# Altium PCB USB-I2C.PcbDoc
Units mm, origin at the board's own origin, x right, y up, seen from the top; angles counter-clockwise.
Board outline 60 x 42.5 mm, 2 copper layers (Top Layer, Bottom Layer); 41 components, 25 nets, 147 pads, 24 vias.
Unrouted connection lines stored in the file: 1.
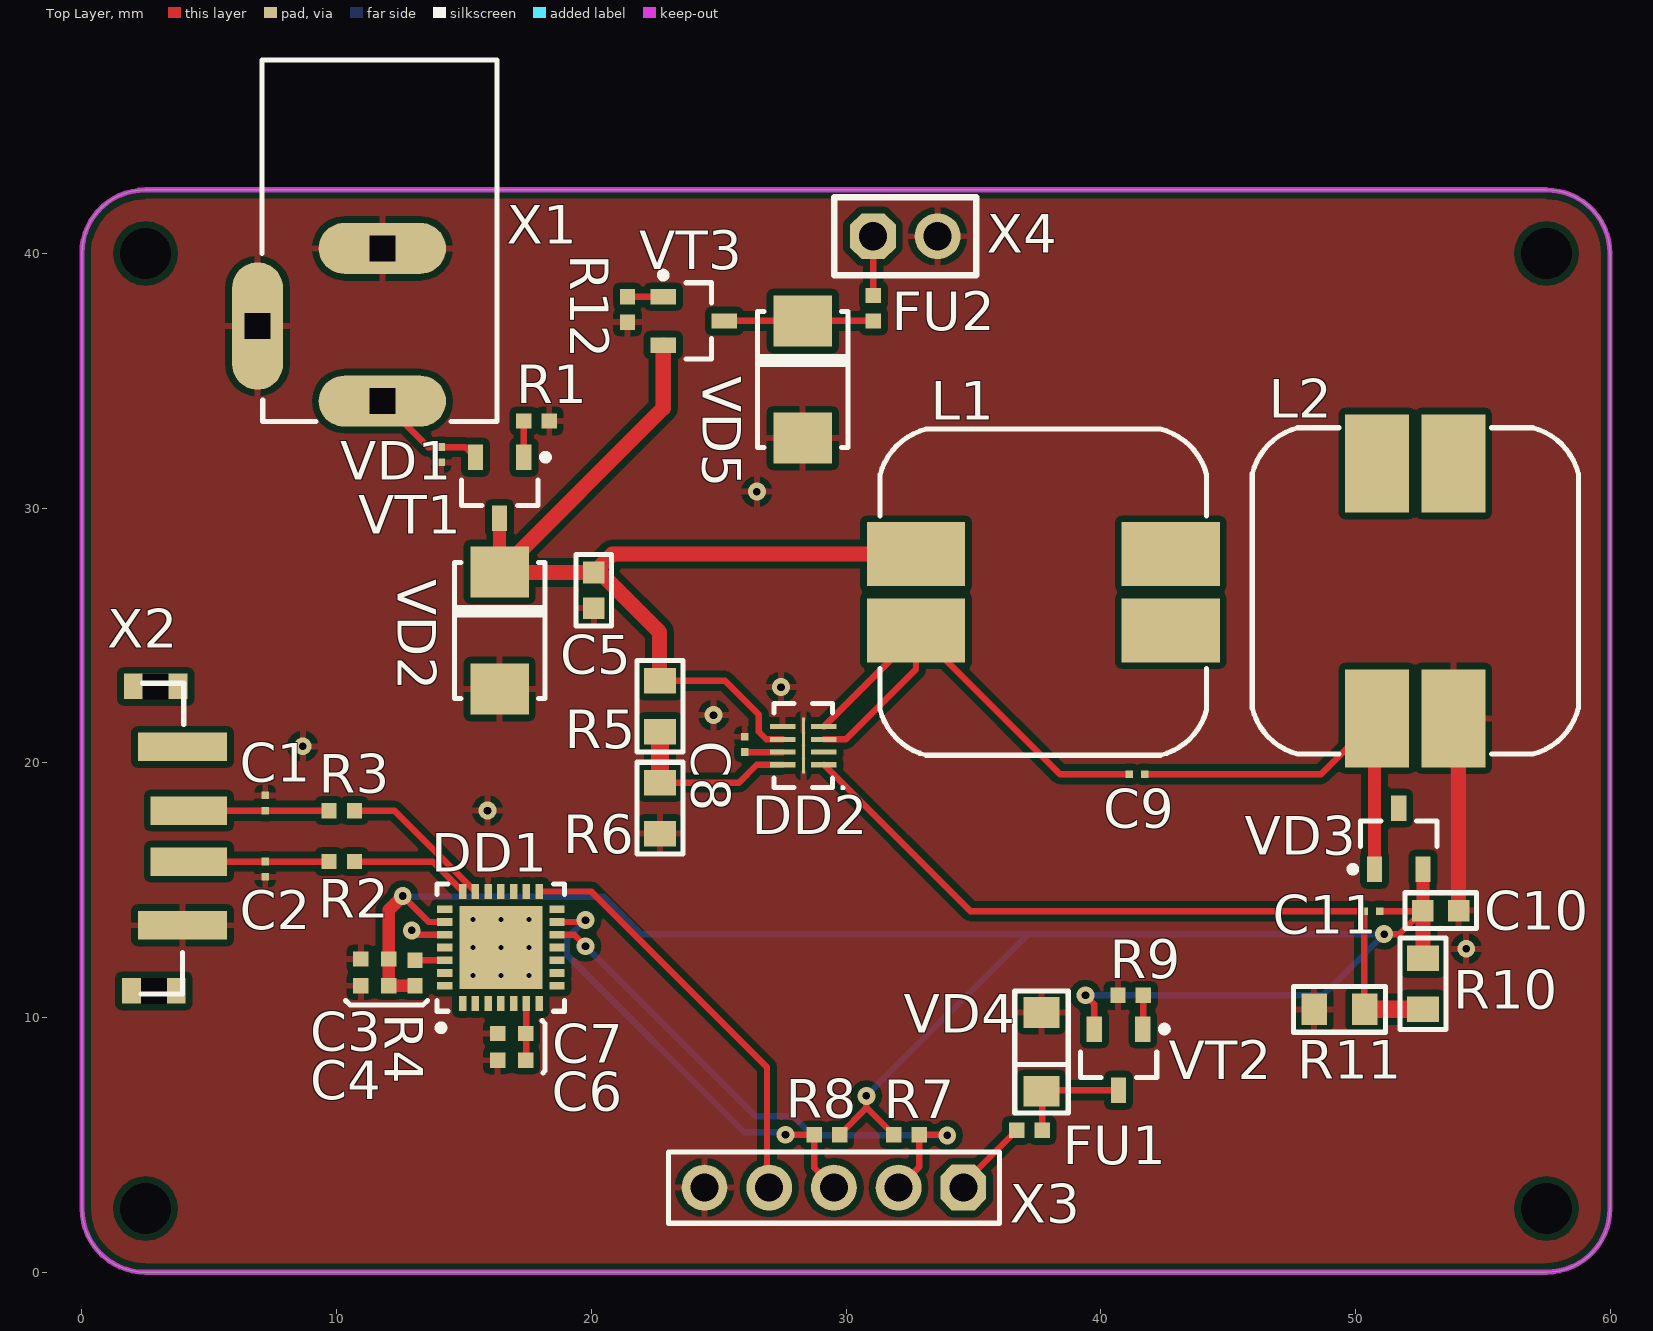
[diagram p0: Top Layer view]
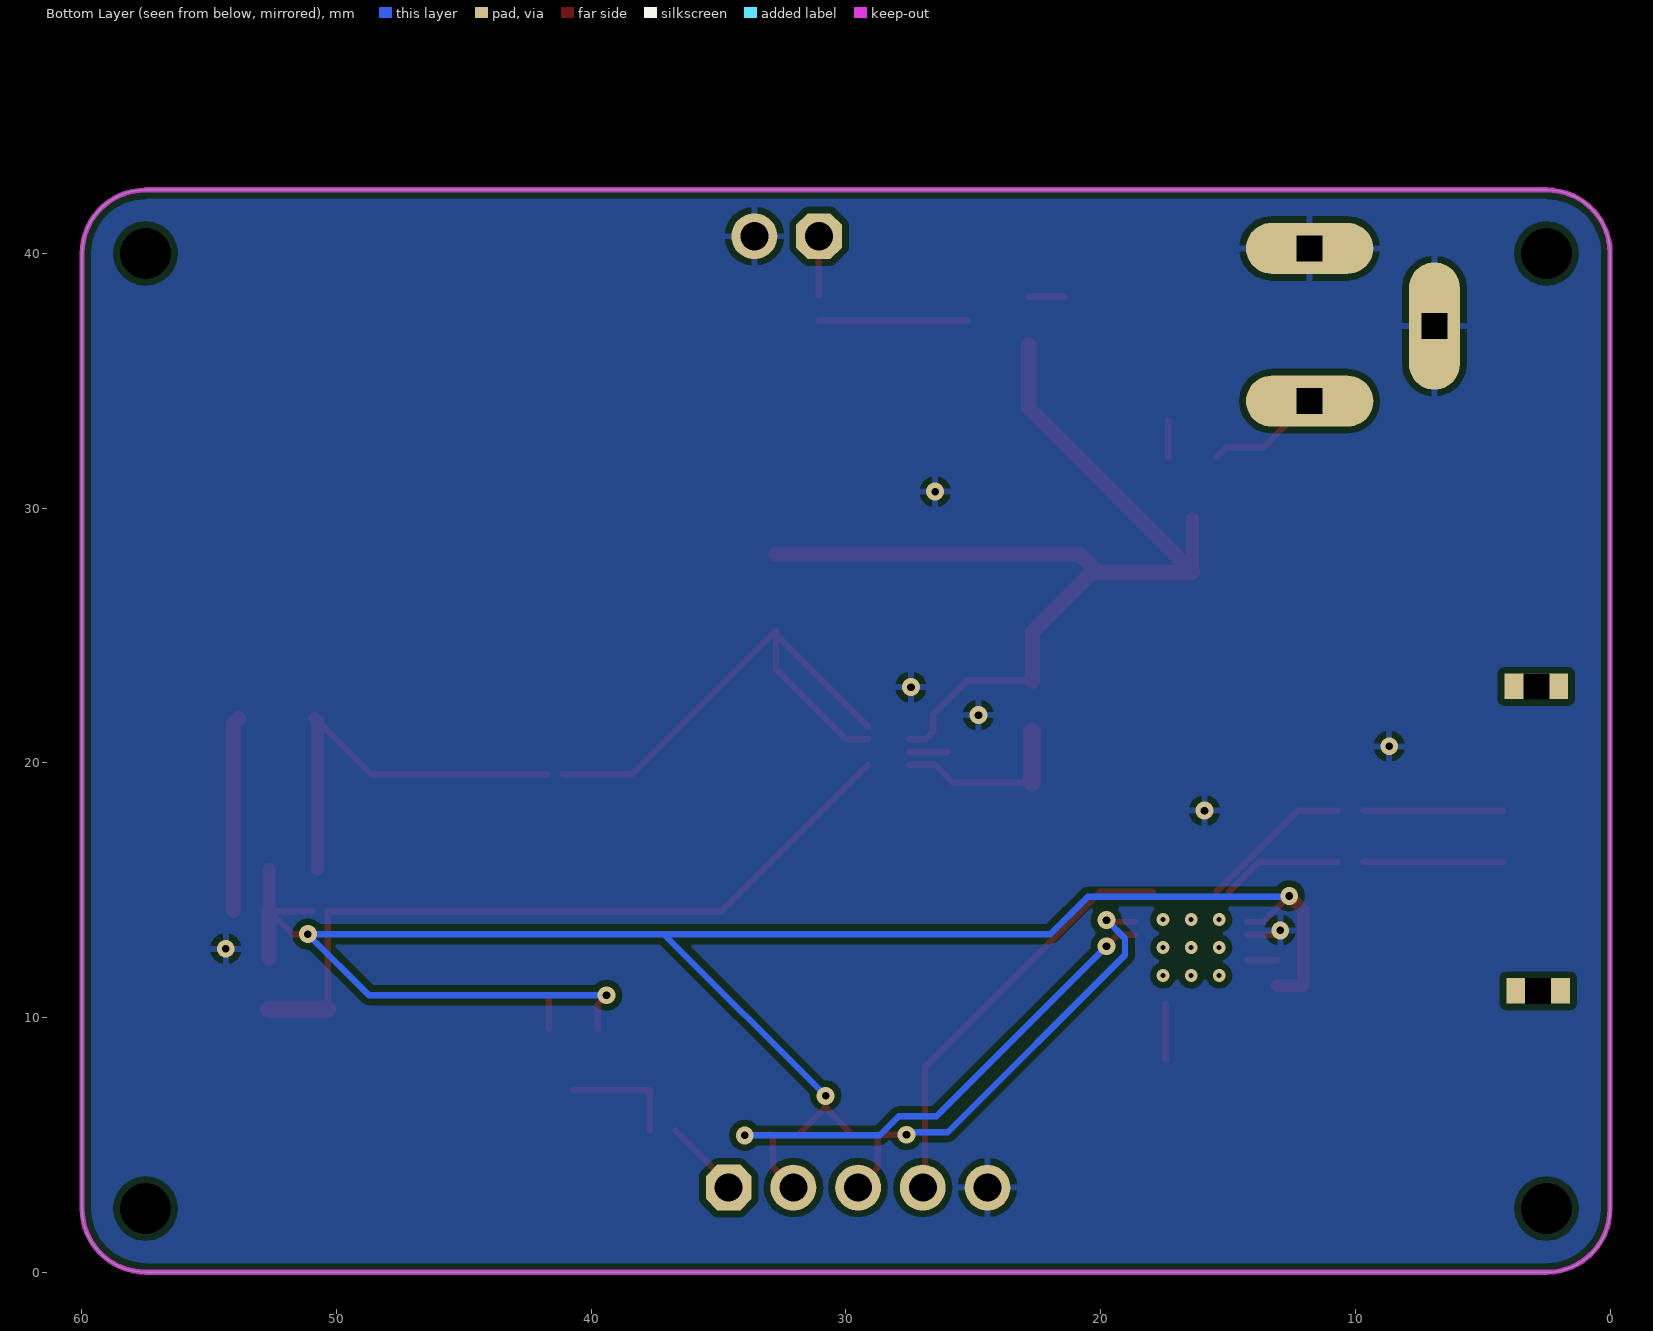
[diagram p1: Bottom Layer view, seen from below]
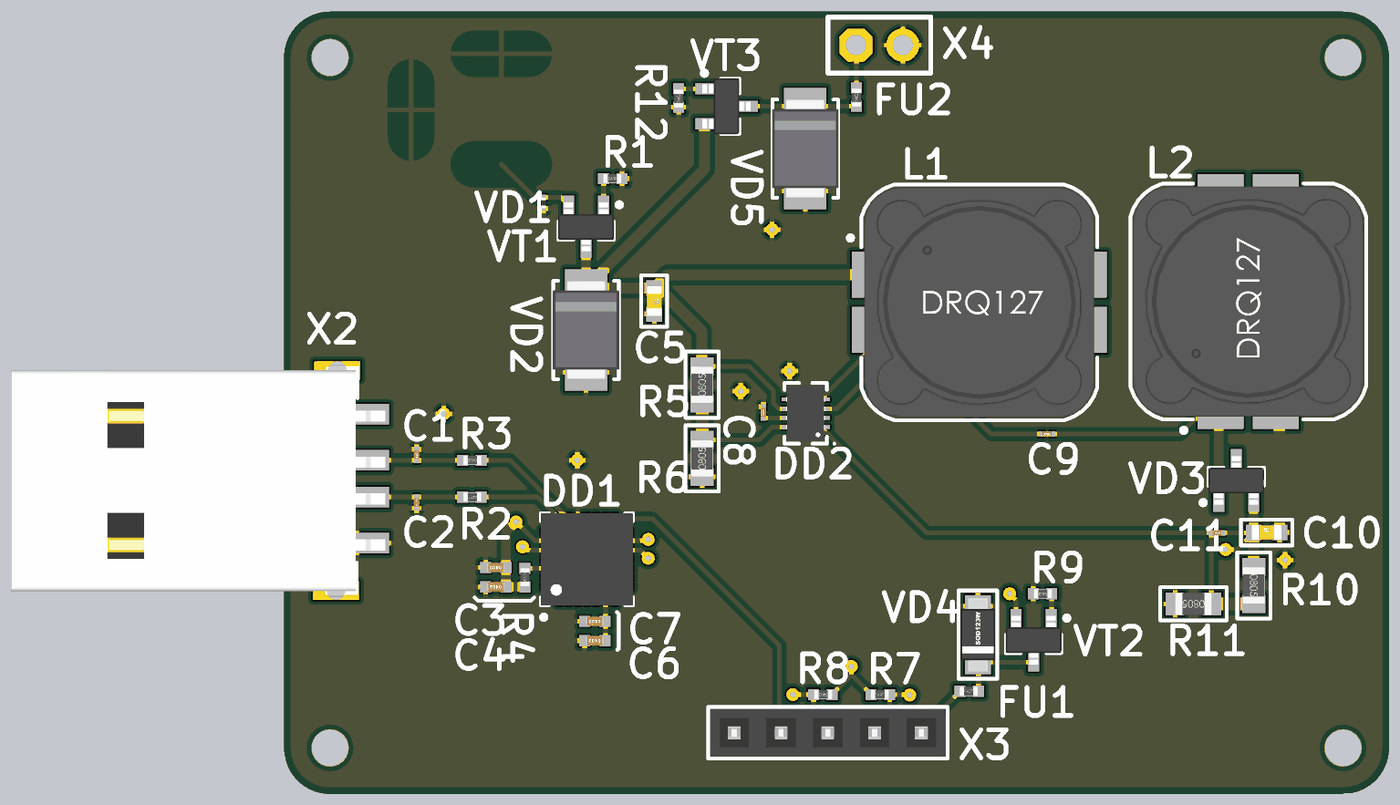
[diagram p2: 3D render of the assembled board from above, using the file's embedded part models]

## Layer stack, top to bottom
Top Solder: solder mask 0.0102, Solder Resist, Dk 3.5
Top Layer: signal copper 0.0356
Dielectric 1: dielectric 0.32, FR-4, Dk 4.8
Bottom Layer: signal copper 0.0356
Bottom Solder: solder mask 0.0102, Solder Resist, Dk 3.5

## Board outline
0,2.5 0,40 0,40.001 cw(c2.492,40.001) 2.492,42.493 2.5,42.5 57.5,42.5 57.5,42.492 cw(c57.5,40) 59.992,40 60,40 60,2.5 59.992,2.5 cw(c57.5,2.5) 57.5,0.008 57.5,0 2.5,0 cw(c2.5,2.492)

## Design rules (kind name [scope] priority, off if disabled: settings)
Clearance [All] p1: gap=0.254 ignorepadtopadclearanceinfootprint=FALSE except(0: Arc-Hole Track-Hole SMDPad-Hole THPad-Hole Via-Hole Fill-Hole Poly-Hole Region-Hole Text-Hole)
PolygonConnect [All] p1: connectstyle=Relief reliefconductorwidth=0.254 reliefentries=4 polygonreliefangle="90 Angle" airgapwidth=0.254
RoutingVias [All] p1: holewidth=0.711 width=1.27 viastyle="Through Hole" minholewidth=0.711 minwidth=1.27 maxholewidth=0.711 maxwidth=1.27
SolderMaskExpansion [All] p1: expansion=0.102
Width [All] p1: maxlimit=0.7 minlimit=0.25 preferedwidth=0.4
30 further rules are at their usual default settings.

## Components (designator, comment, footprint, x,y, rotation, side; value= is the part's Value field where it differs from the comment)
C1 "Capacitor" CH0201C 7.2,18.425 r90 top
C2 "Capacitor" CH0201C 7.2,15.825 r270 top
C3 "Capacitor" CH0402C 11.5,12.3 r180 top
C4 "Capacitor" CH0402C 11.5,11.25 r180 top
C5 "Capacitor" CH0603C 20.1,26.775 r270 top
C6 "Capacitor" CH0402C 16.875,8.325 r180 top
C7 "Capacitor" CH0402C 16.875,9.375 r180 top
C8 "Capacitor" CH0201C 26.025,20.725 r90 top
C9 "Capacitor" CH0201C 41.425,19.55 r0 top
C10 "Capacitor" CH0603C 53.35,14.2 r0 top
C11 "Capacitor" CH0201C 50.65,14.175 r180 top
DD1 "FT260Q-R" FT260-Q 16.45,12.75 r90 top
DD2 "LT8335" LT8335 28.325,20.675 r180 top
FU1 "Fuse" CH0402R 37.2,5.575 r0 top value=200мА
FU2 "Fuse" CH0402R 31.075,37.85 r90 top value=200мА
L1 "Ferrite bead" "IND: DRQ127" 37.75,26.7 r0 top
L2 "Ferrite bead" "IND: DRQ127" 52.35,26.75 r90 top
R1 "Res_0.125" CH0402R 17.85,33.425 r0 top
R2 "Res_0.125" CH0402R 10.2,16.125 r180 top
R3 "Res_0.125" CH0402R 10.2,18.125 r180 top
R4 "Res_0.125" CH0402R 13.075,11.75 r270 top
R5 "Res_0.5" CH0805R 22.7,22.225 r90 top
R6 "Res_0.5" CH0805R 22.7,18.225 r90 top
R7 "Res_0.125" CH0402R 32.375,5.4 r0 top
R8 "Res_0.125" CH0402R 29.25,5.4 r180 top
R9 "Res_0.125" CH0402R 41.175,10.875 r180 top
R10 "Res_0.125" CH0805R 52.65,11.325 r270 top
R11 "Res_0.125" CH0805R 49.375,10.325 r180 top
R12 "Res_0.125" CH0402R 21.425,37.8 r90 top
VD1 "TVS-diod_simmetrical" CH0201L 14.1,32.1 r90 top
VD2 "TVS-diod_directed" DO214AA 16.4,25.2 r90 top
VD3 "Diod Schottky" SOT23_132 51.7,17.025 r90 top
VD4 "TVS-diod_directed" SOD123W 37.675,8.65 r270 top
VD5 "TVS-diod_directed" DO214AA 28.3,35.05 r90 top
VT1 "*" SOT23_132 16.4,30.8 r270 top
VT2 "*" SOT23_132 40.7,8.35 r270 top
VT3 "*" SOT23_132 24.025,37.35 r0 top
X1 "2_pins" "CON: 163-179PH-EX" 11.8,47.9 r270 top
X2 "USB 2.0" USB 4.2,17.125 r0 top
X3 "Header_5_plg" "CON: PBS-5" 29.525,3.325 r180 top
X4 "2_pins" "CON: PBS-2" 32.325,40.675 r0 top

## Footprints (in the part's own frame and the unit in brackets; to place one, negate y for a bottom-side part, rotate by r counter-clockwise, add the part's x,y. Pads: shape width x height; smd on the part's side, far side on the other; paste and mask are expansions set on the pad)
CH0201C [mm]
  rect 0.3x0.3 smd: 1(-0.3,0) 2(0.3,0)
  body extent -0.3,-0.15 0.3,0.15, height 0.31
CH0201L [mm]
  rect 0.3x0.3 smd: 1(-0.3,0) 2(0.3,0)
  body extent -0.3,-0.15 0.3,0.15, height 0.3
CH0402C [mm]
  rect 0.6x0.6 smd: 1(-0.55,0) 2(0.55,0)
  body extent -0.51,-0.25 0.51,0.25, height 0.51
CH0402R [mm]
  rect 0.6x0.6 smd: 1(-0.5,0) 2(0.5,0)
  body extent -0.52,-0.25 0.47,0.25, height 0.34
CH0603C [mm] "Chip Capacitor, 2-Leads, Body 1,53x0,85mm, IPC Medium Density"
  rect 0.85x0.85 smd: 1(-0.7,0) 2(0.7,0)
  silkscreen extent -1.4,-0.7 1.4,0.7, body extent -0.8,-0.4 0.8,0.4, height 0.3
CH0805R [mm]
  rect 1x1.25 smd: 1(-1,0) 2(1,0)
  silkscreen extent -1.8,-0.9 1.8,0.9, body extent -1,-0.6 1,0.6, height 0.44
"CON: 163-179PH-EX" [mm]
  oval 2x5 hole 1 square: 1(13.7,0) 2(7.7,0)
  oval 5x2 hole 1 square: 2(10.75,-4.9)
  round 0.5 on Mech1: ""(14,-3)
  silkscreen extent 0.3,-4.72 14.5,4.5, body extent 0,-5 14.4,4.4, height 11.05
"CON: PBS-2" [mm] "PBS-2"
  oct 1.8x1.8 hole 1.1: 1(-1.27,0)
  round 1.8 hole 1.1: 2(1.27,0)
  silkscreen extent -2.79,-1.52 2.79,1.52
"CON: PBS-5" [mm] "PBS-5"
  oct 1.8x1.8 hole 1.1: 1(-5.08,0)
  round 1.8 hole 1.1: 2(-2.54,0) 3(0,0) 4(2.54,0) 5(5.08,0)
  silkscreen extent -6.5,-1.4 6.5,1.4, body extent -6.35,-1.27 6.35,1.27, height 8.43
DO214AA [mm] "SMB"
  rect 2x2.3 smd: 1(-2.3,0) 2(2.3,0)
  round 0.5 on Mech1: ""(2.1,1.3)
  silkscreen extent -2.67,-1.78 2.67,1.78, body extent -2.7,-1.8 2.7,1.8, height 2.3
FT260-Q [mm] "PQFN, 28-Leads, Body 5,00x5,00mm, Pitch 0,50mm, Thermal Pad 3,25x3,25mm, IPC Medium Density"
  rect 0.6x0.3 smd: 1(-2.2,1.5) 2(-2.2,1) 3(-2.2,0.5) 4(-2.2,0) 5(-2.2,-0.5) 6(-2.2,-1) 7(-2.2,-1.5) 15(2.2,-1.5) 16(2.2,-1) 17(2.2,-0.5) 18(2.2,0) 19(2.2,0.5) 20(2.2,1) 21(2.2,1.5)
  rect 0.3x0.6 smd: 8(-1.5,-2.2) 9(-1,-2.2) 10(-0.5,-2.2) 11(0,-2.2) 12(0.5,-2.2) 13(1,-2.2) 14(1.5,-2.2) 22(1.5,2.2) 23(1,2.2) 24(0.5,2.2) 25(0,2.2) 26(-0.5,2.2) 27(-1,2.2) 28(-1.5,2.2)
  rect 3.25x3.25 smd: 29(0,0)
  silkscreen extent -3.27,-2.5 2.5,2.5, body extent -2.5,-2.5 2.5,2.5, height 0.8
"IND: DRQ127" [mm] "Inductor"
  rect 3.85x2.5 smd: 1(-5,1.5) 2(-5,-1.5) 3(5,-1.5) 4(5,1.5)
  round 0.5 on Top Overlay: ""(-7,3.5)
  round 0.5 on Mech1: ""(-5.7,3.5)
  silkscreen extent -6.41,-6.4 6.41,6.4, body extent -6.25,-6.25 6.25,6.25, height 8
LT8335 [mm] "SON, 8-Leads, Body 3,00x2,00mm, Pitch 0,50mm, Thermal Pad 2,20x0,12mm, IPC Medium Density"
  rect 1x0.2 smd: 1(-0.81,0.75) 2(-0.81,0.25) 3(-0.81,-0.25) 4(-0.81,-0.75) 5(0.81,-0.75) 6(0.81,-0.25) 7(0.81,0.25) 8(0.81,0.75)
  rect 0.12x2.2 smd: 9(0,0)
  silkscreen extent -1.6,-1.65 1.15,1.7, body extent -1.05,-1.5 1.05,1.5, height 0.75
SOD123W [mm]
  rect 1.2x1.4 smd: 1(-1.55,0) 2(1.55,0)
  silkscreen extent -2.4,-1.05 2.4,1.05, body extent -2,-0.95 2,0.95, height 1.1
SOT23_132 [mm] "SOT23, 3-Leads, Body 3,0x2,6mm (max), Pitch 0,95mm, IPC Medium Density"
  rect 1x0.6 smd: 1(-1.2,0.95) 2(-1.2,-0.95) 3(1.2,0)
  round 0.5 on Mech1: ""(-0.9,1.1)
  silkscreen extent -1.32,-1.5 0.7,1.92, body extent -1.32,-1.52 1.32,1.52, height 1.12
USB [mm]
  rect 3.5x1.12 smd: 1(-0.25,3.5) 4(-0.25,-3.5)
  rect 3x1.12 smd: 2(0,1) 3(0,-1)
  rect 2.5x1 hole 1 square: 10(-1.375,-6.075) 10(-1.3,5.875)
  silkscreen extent -1.88,-6.2 -0.2,6, body extent -19,-6.4 1.3,6.2, height 3.2

## Part data
C1 C2: Capacitance=47, Case=0201, Manufacture=TDK, Voltage=25В, HelpURL=https://ru.mouser.com/ProductDetail/TDK/CGA1A2C0G1E470J030BA?qs=LcTL%2f5vFEzGP84WOj%2f5Msw==&utm_source=netcomponents&utm_medium=aggregator&utm_campaign=CGA1A2C0G1E470J030BA&utm_term=CGA1A2C0G1E470J030BA&utm_content=TDK, Model=CGA1A2C0G1E470J030BA
C3 C6: Capacitance=4,7мк, Case=0402, Manufacture="Murata Electronics", Voltage=10В, HelpURL=https://ru.mouser.com/ProductDetail/Murata-Electronics/ZRB15XR61A475KE01D?qs=sGAEpiMZZMs0AnBnWHyRQO9VYadaKTO%252beZnE9zFUsbv4FmCibz4ZfQ%3d%3d, Model=ZRB15XR61A475KE01D
C4 C7: Capacitance=0,1мк, Case=0402, Manufacture=AVX, Voltage=10В, HelpURL=https://ru.mouser.com/ProductDetail/AVX/0402ZD103KAT2A?qs=sGAEpiMZZMs0AnBnWHyRQKdiqyDPVQdAu74W%2fwwRq8A%3d, Model=0402ZD103KAT2A
C5: Capacitance=4,7мк, Case=0603, Manufacture="Murata Electronics", Voltage=16В, HelpURL=https://ru.mouser.com/ProductDetail/Murata-Electronics/GRM188R61C475KAAJD?qs=sGAEpiMZZMs0AnBnWHyRQHS%2f3XE0oMwxE3tFP4oDIiY%3d, Model=GRM188R61C475KAAJD
C8 C9: Capacitance=1мк, Case=0201, Manufacture="Murata Electronics", Voltage=10В, HelpURL=https://ru.mouser.com/ProductDetail/Murata-Electronics/GRM033C81A105ME05E?qs=sGAEpiMZZMs0AnBnWHyRQN7%2fAA2D2lPPXfhIkJ3ChWM%252bNp28BKy3Ug%3d%3d, Model=GRM033C81A105ME05E
C10: Capacitance=22мк, Case=0603, Manufacture="Murata Electronics", Voltage=10В, HelpURL=https://ru.mouser.com/ProductDetail/Murata-Electronics/ZRB18AR61A226ME01L?qs=sGAEpiMZZMs0AnBnWHyRQN7%2fAA2D2lPPknK%252bZ26wfT%2fc2YZrPwOUrA%3d%3d, Model=ZRB18AR61A226ME01L
C11: Capacitance=5,6, Case=0201, Manufacture=KEMET, Voltage=10В, HelpURL=https://ru.mouser.com/ProductDetail/KEMET/CBR02C569D8GAC?qs=sGAEpiMZZMs0AnBnWHyRQKJCfzG%2fi9wHO4Sz%252bJJDLvGSjWY7CQ%2fxZQ%3d%3d, Model=CBR02C569D8GAC
DD1: "IC BRIDGE USB TO UART/I2C 28WQFN", Case="28-WQFN (5x5)", Manufacture="FTDI, Future Technology Devices International Ltd", HelpURL=https://www.digikey.com/product-detail/en/ftdi-future-technology-devices-international-ltd/FT260Q-R/FT260Q-RTR-ND/5956531, Model=FT260Q-R
DD2: "4~16 to 5", HelpURL=https://www.analog.com/en/products/lt8335.html#product-overview, Model=LT8335
L1 L2: Inductance=1.8мк, Manufacture="Wurth Electronics", Max DC current=4,7А, HelpURL=https://www2.mouser.com/ProductDetail/Wurth-Electronics/744877001?qs=%2fha2pyFaduiBH%252bVtwFFo7m4jeDBiCtVkn%2fV2DZvEkMQ%3d, Impedance=25мОм, Model=744877001
R1 R9 R12: Case=0402, Manufacture=Yageo, HelpURL=https://ru.mouser.com/ProductDetail/Yageo/AC0402FR-7W10KL?qs=sGAEpiMZZMvdGkrng054txbN%2f5LBcxld3gyqgmBuiXRPLjwmdNqO3A%3d%3d, Impedance=10К, Model=AC0402FR-7W10KL
R2 R3 R4: Case=0402, Manufacture="TE Connectivity / Holsworthy"
  R2 R3: HelpURL=https://ru.mouser.com/ProductDetail/TE-Connectivity-Holsworthy/CRGP0402F33R?qs=sGAEpiMZZMvdGkrng054tz1y1XEHv7sN6aY9AoYHboGDePQNpV5Q0w%3d%3d, Impedance=33, Model=CRGP0402F33R
  R4: HelpURL=https://ru.mouser.com/ProductDetail/TE-Connectivity-Holsworthy/CRGP0402F1K5?qs=sGAEpiMZZMvdGkrng054tz1y1XEHv7sNNFRrkK9abQmLny45pEqOiQ%3d%3d, Impedance=1,5К, Model=CRGP0402F1K5
R5: Case=0805, Manufacture="KOA Speer", HelpURL=https://ru.mouser.com/ProductDetail/KOA-Speer/SG73G2ATTD1004D?qs=sGAEpiMZZMvdGkrng054tz1y1XEHv7sNqdEHfKLpAGs6ZpwyMDczVg%3d%3d, Impedance=1М, Model=SG73G2ATTD1004D
R6: Case=0805, Manufacture=Panasonic, HelpURL=https://ru.mouser.com/ProductDetail/Panasonic/ERJ-P06F8063V?qs=sGAEpiMZZMvdGkrng054t5hHekyimr992M3FN7jjBTE%3d, Impedance=806К, Model=ERJ-P06F8063V
R7 R8: Case=0402, Manufacture="KOA Speer", HelpURL=https://ru.mouser.com/ProductDetail/KOA-Speer/SG73P1ETTP1001F?qs=sGAEpiMZZMvdGkrng054t%2f16WM9J8YovCYtiWkW5%2faA%3d, Impedance=1К, Model=SG73P1ETTP1001F
R10 R11: Case=0805, Manufacture="Panasonic Industrial Devices"
  R10: HelpURL=https://ru.mouser.com/ProductDetail/Panasonic-Industrial-Devices/ERJ-6ENF4993V?qs=sGAEpiMZZMvdGkrng054t7mzY140rHw%252bZDSgtKJeHpI%3d, Impedance=499К, Model=ERJ-6ENF4993V
  R11: HelpURL=https://ru.mouser.com/ProductDetail/Panasonic-Industrial-Devices/ERJ-6ENF2323V?qs=sGAEpiMZZMvdGkrng054tx7%2f6%252bNA3LAJkwXIsOwAlfs%3d, Impedance=232К, Model=ERJ-6ENF2323V
VD1: Case=0201, Clamping Voltage=12В, Manufacturer=Littelfuse, HelpURL=https://ru.mouser.com/ProductDetail/Littelfuse/SP3022-01WTG?qs=sGAEpiMZZMsItbzKdwyIez7NGmqnzL8h47KYC2e%252bM%2f4NVETz1A7KGA%3d%3d, Model=SP3022-01WTG
VD2 VD5: Case=DO-214AA-2, Clamping_Voltage=12В, Manufacturer=Bourns, HelpURL=https://ru.mouser.com/ProductDetail/Bourns/CD214B-T70ALF?qs=sGAEpiMZZMsItbzKdwyIexL102H4jKkFOiaKL2EcEgo%3d, Model=CD214B-T7.0ALF
VD3: Manufacturer=Toshiba, HelpURL=https://ru.mouser.com/ProductDetail/Toshiba/1SS374TE85LF?qs=sGAEpiMZZMtQ8nqTKtFS%2fOl9H8JU2QXlyYvmz0vcRmull8rlMQPxpQ%3d%3d, If=200мА, Model=1SS374(TE85L,F), Vrrm=15В
VD4: Case=SOD-123W, Clamping_Voltage=8В, Manufacturer=Nexperia, HelpURL=https://ru.mouser.com/ProductDetail/Nexperia/PTVS3V3S1UTR115?qs=sGAEpiMZZMsItbzKdwyIe55sLWjhUV0FnMtsDZGUovc%3d, Model=PTVS3V3S1UTR,115
VT1 VT3: library part P-Channel, Manufacture="Diodes Incorporated", HelpURL=https://ru.mouser.com/ProductDetail/Diodes-Incorporated/DMG2301LK-7?qs=sGAEpiMZZMshyDBzk1%2fWi3VK%2fMVeCy7TGgocA8mg7FfG8rajAhy0Kw%3d%3d, Id=2,4А, Model=DMG2301LK-7, Vgs=300мВ, Vsd=20В
VT2: library part P-Channel, Manufacture="Vishay / Siliconix", HelpURL=https://ru.mouser.com/ProductDetail/Vishay-Siliconix/SI2329DS-T1-GE3?qs=sGAEpiMZZMshyDBzk1%2fWi0IfsQ3%2f3bgnEGeh9AiMdAo%3d, Id=6А, Model=SI2329DS-T1-GE3, Vgs=350мВ, Vsd=8В
X2: library part USB-A, "USB", Manufacturer="TE Connectivity", ComponentKind="type A", HelpURL=https://www2.mouser.com/ProductDetail/Wurth-Electronics/629004113921?qs=35zkduByVmhHRkVkRjAlEQ==, Model=292303-2, Vcc=+5В
X3: library part connect6, "Разъем - 5 конт. вилка", Contact_1=+5В, Contact_2=SCL, Contact_3=SDA, Contact_4=INT, Contact_5=GND, Etch=2,54mm, HelpURL=https://ru.mouser.com/ProductDetail/Harwin/M50-3140545?qs=sGAEpiMZZMs%252bGHln7q6pm8Vn94ktop%2FJbKjRjRRkUDI6c9DH7Y2OdA%3D%3D
FU1 FU2: HelpURL=https://www2.mouser.com/ProductDetail/Bourns/SF-0402FP020F-2?qs=sGAEpiMZZMtxU2g%2f1juGqWJziY9CkRY0v%252bd32oCrRTr%2fW8XqdHGjQA%3d%3d
X1: HelpURL=https://ru.farnell.com/gct-global-connector-technology/dcj250-10-a-k1-k/dc-power-jack-5a-20vdc-black/dp/2524130?st=power%20jack, Vcc=+12В
X4: HelpURL=https://ru.mouser.com/ProductDetail/Harwin/M50-3140245R?qs=sGAEpiMZZMs%252bGHln7q6pm8Vn94ktop%2FJtmD0IM0sqjtMooR%2Fqw0FIA%3D%3D, Vcc=+12В

## Free pads (board coordinates)
  round 0 hole 2: ""(2.5,2.5) ""(2.5,40) ""(57.5,2.5) ""(57.5,40)

## Via types
v1: diameter 0.7, hole 0.3, Top Layer to Bottom Layer, 15 vias
v2: diameter 0.5, hole 0.2, Top Layer to Bottom Layer, 9 vias

## Nets (pads, with @x,y where several pads share a name; then routed paths per layer and width w, separated by ;. In a path a pad name is that pad's centre, name@x,y a point inside that pad or via, vN(x,y) a via of type N, cw(c..) or ccw(c..) an arc to the next point about the centre after c; other vN are vias at no path point)
+5В: C3.1 C4.1 C10.1 C11.1 DD1.23 R4.2 R7.1 R8.1 R10.1 VD3.2 VT2.2 | length 79.7
  Top Layer w0.25: v1(12.6,14.775) 13.625,13.75 DD1.23 ; R8.1 30.8,6.45 30.8,6.475 ; v1(30.8,6.925) 30.8,6.475 ; R7.1 30.8,6.475 ; v1(39.4,10.875) 39.75,10.525 VT2.2 ; C11.1 C10.1@52.625,14.175 ; v1(51.125,13.275) 51.725,13.275 C10.1@52.625,14.175 ; C10.1 C10.1@52.625,14.175
  Top Layer w0.5: v1(12.6,14.775) 12.05,14.225 C3.1 C4.1 R4.2 ; C10.1 VD3.2
  Top Layer w0.6: R10.1 C10.1
  Bottom Layer w0.25: v1@12.6,14.75 20.5,14.75 21.975,13.275 37.15,13.275 ; v1(30.8,6.925) 37.15,13.275 ; v1(39.4,10.875) 48.725,10.875 v1(51.125,13.275) 37.15,13.275
GND: C1.2 C2.2 C3.2 C4.2 C5.2 C6.2 C7.2 C8.2 C10.2 DD1.19 DD1.24 DD2.5 DD2.9 L2.2 R1.2 R6.1 R9.2 R11.2 R12.1 VD1.1 VD2.1 VD4.1 VD5.1 X1.2 X2.4 X3.5 X4.2 | length 9
  Top Layer w0.25: v1(12.95,13.425) 13.125,13.25 DD1.24
  Top Layer w0.6: L2.2 54.05,21.55 C10.2
  other v1: 54.35,12.7 15.925,18.125 8.675,20.65 24.8,21.875 27.45,22.975 26.5,30.65
NetC1_1: C1.1 R3.2 X2.2 | length 5.5
  Top Layer w0.254: X2.2 C1.1 R3.2
NetC2_1: C2.1 R2.2 X2.3 | length 5.5
  Top Layer w0.254: X2.3 C2.1 R2.2
NetC5_1: C5.1 DD2.6 L1.1 R5.2 VD2.2 VT1.3 VT3.2 | length 42
  Top Layer w0.25: R5.2 25.25,23.225 26.575,21.9 26.575,21.225 26.875,20.925 DD2.6
  Top Layer w0.5: VT1.3 VD2.2 VD2.2@16.425,27.475
  Top Layer w0.6: VD2.2 22.825,33.925 VT3.2 ; VD2.2@16.425,27.475 C5.1 ; R5.2 22.675,23.2 22.675,25.133 20.333,27.475 C5.1 ; L1.1 20.825,28.2 C5.1
NetC6_1: C6.1 C7.1 DD1.6 DD1.22 | length 2.2
  Top Layer w0.25: C6.1 17.45,8.35 DD1.6
NetC8_1: C8.1 DD2.7 | length 1.5
  Top Layer w0.25: C8.1 26.029,20.421 DD2.7@27.515,20.421
NetC9_1: C9.1 DD2.3 DD2.4 L1.2 | length 22.1
  Top Layer w0.25: DD2.3 30,20.925 32.75,23.675 L1.2@32.75,25.04 ; DD2.4 L1.2@32.75,25.04 ; C9.1 38.4,19.55 L1.2 L1.2@32.75,25.04
NetC9_2: C9.2 L2.1 VD3.1 | length 15.9
  Top Layer w0.25: C9.2 48.65,19.55 L2.1@50.75,21.65
  Top Layer w0.5: VD3.1 50.75,21.65 L2.1
NetC11_2: C11.2 DD2.1 R10.2 R11.1 | length 29.7
  Top Layer w0.25: DD2.1 34.885,14.175 C11.2 50.35,10.35 R11.1
  Top Layer w0.7: R11.1 R10.2
NetDD1_12: DD1.12 R7.2 X3.2 | length 22.1
  Top Layer w0.25: DD1.12 19.325,13.25 v1(19.775,12.8) ; X3.2 32.875,4.135 R7.2 33.95,5.4 v1(33.975,5.375)
  Bottom Layer w0.25: v1(19.775,12.8) 26.446,6.129 27.927,6.129 28.681,5.375 v1(33.975,5.375)
NetDD1_13: DD1.13 R8.2 X3.3 | length 17.9
  Top Layer w0.25: DD1.13 19.7,13.75 v1(19.775,13.825) ; v1(27.625,5.4) R8.2 28.75,4.1 X3.3
  Bottom Layer w0.25: v1(19.775,13.825) 19.769,13.825 19.046,13.102 19.046,12.454 26,5.5 27.525,5.5 v1(27.625,5.4)
NetDD1_15: DD1.15 X3.4 | length 16.6
  Top Layer w0.25: DD1.15 20,14.95 26.896,8.054 26.896,3.414 X3.4
NetDD1_20: DD1.20 R3.1 | length 6.1
  Top Layer w0.25: R3.1 12.275,18.125 DD1.20
NetDD1_21: DD1.21 R2.1 | length 4.7
  Top Layer w0.25: R2.1 13.775,16.125 DD1.21
NetDD1_26: DD1.26 R4.1 | length 1.2
  Top Layer w0.25: R4.1 DD1.26
NetDD2_8: DD2.8 R5.1 R6.2 | length 7.1
  Top Layer w0.25: R6.2 25.8,19.225 26.5,19.925 DD2.8
  Top Layer w0.7: R6.2 R5.1
NetFU1_1: FU1.1 X3.1 | length 3.1
  Top Layer w0.25: X3.1 34.605,3.48 FU1.1
NetFU1_2: FU1.2 VD4.2 VT2.3 | length 4.6
  Top Layer w0.25: FU1.2 37.7,7.075 VD4.2 37.725,7.15 VT2.3
NetFU2_1: FU2.1 VD5.2 VT3.3 | length 5.9
  Top Layer w0.254: VT3.3 VD5.2 FU2.1
NetFU2_2: FU2.2 X4.1 | length 2.3
  Top Layer w0.254: X4.1 31.075,40.655 FU2.2
NetR1_1: R1.1 VT1.1 | length 1.4
  Top Layer w0.254: VT1.1 R1.1
NetR9_1: R9.1 VT2.1 | length 1.3
  Top Layer w0.25: VT2.1 41.675,9.575 R9.1
NetR12_2: R12.2 VT3.1 | length 1.4
  Top Layer w0.254: R12.2 VT3.1
NetVD1_2: VD1.2 VT1.2 X1.1 | length 4.6
  Top Layer w0.254: X1.1 13.6,32.4 VD1.2 15.05,32.4 VT1.2
pads on no net: DD1.1 DD1.2 DD1.3 DD1.4 DD1.5 DD1.7 DD1.8 DD1.9 DD1.10 DD1.11 DD1.14 DD1.16 DD1.17 DD1.18 DD1.25 DD1.27 DD1.28 DD1.29 DD2.2 L1. L1.3 L1.4 L2. L2.3 L2.4 VD2. VD3. VD3.3 VD5. VT1. VT2. VT3. X1. X2.1 X2.10
copper on no net:
  other v2: 15.35,11.65 16.45,11.65 17.55,11.65 15.35,12.75 16.45,12.75 17.55,12.75 15.35,13.85 16.45,13.85 17.55,13.85

## Polygon pours and split planes (outlines as drawn)
GND on Bottom Layer "Bot Layer-GND" (solid, remove dead copper, pour order 6): 0,42.5 60,42.5 60,0 0,0
GND on Top Layer "Top Layer-GND" (solid, remove dead copper, pour order 8): 0,42.5 60,42.5 60,0 0,0

## Keep-outs
Keep-Out Layer:
  lines w0.2: 0,2.5 0,40 ; 0,40.001 cw(c2.492,40.001) 2.492,42.493 ; 0.008,2.492 ccw(c2.5,2.492) 2.5,0 57.5,0 ; 2.5,42.5 57.5,42.5 ; 57.5,0.008 ccw(c57.5,2.5) 59.992,2.5 ; 57.5,42.492 cw(c57.5,40) 59.992,40 ; 60,2.5 60,40

## Silkscreen, mask and mechanical layers (free items; w line width, h text height)
Top Overlay:
  lines w0.2: 10.35,10.675 10.525,10.5 13.4,10.5 13.575,10.675 ; 18.075,9.875 18.175,9.775 18.175,7.9 18.1,7.825